# Altium PCB eggubator.PcbDoc (part 1 of 2)
Units mil, origin at the board's own origin, x right, y up, seen from the top; angles counter-clockwise.
Board outline 5983.25 x 3976.38 mil, 2 copper layers (Top Layer, Bottom Layer); 80 components, 96 nets, 327 pads, 68 vias.
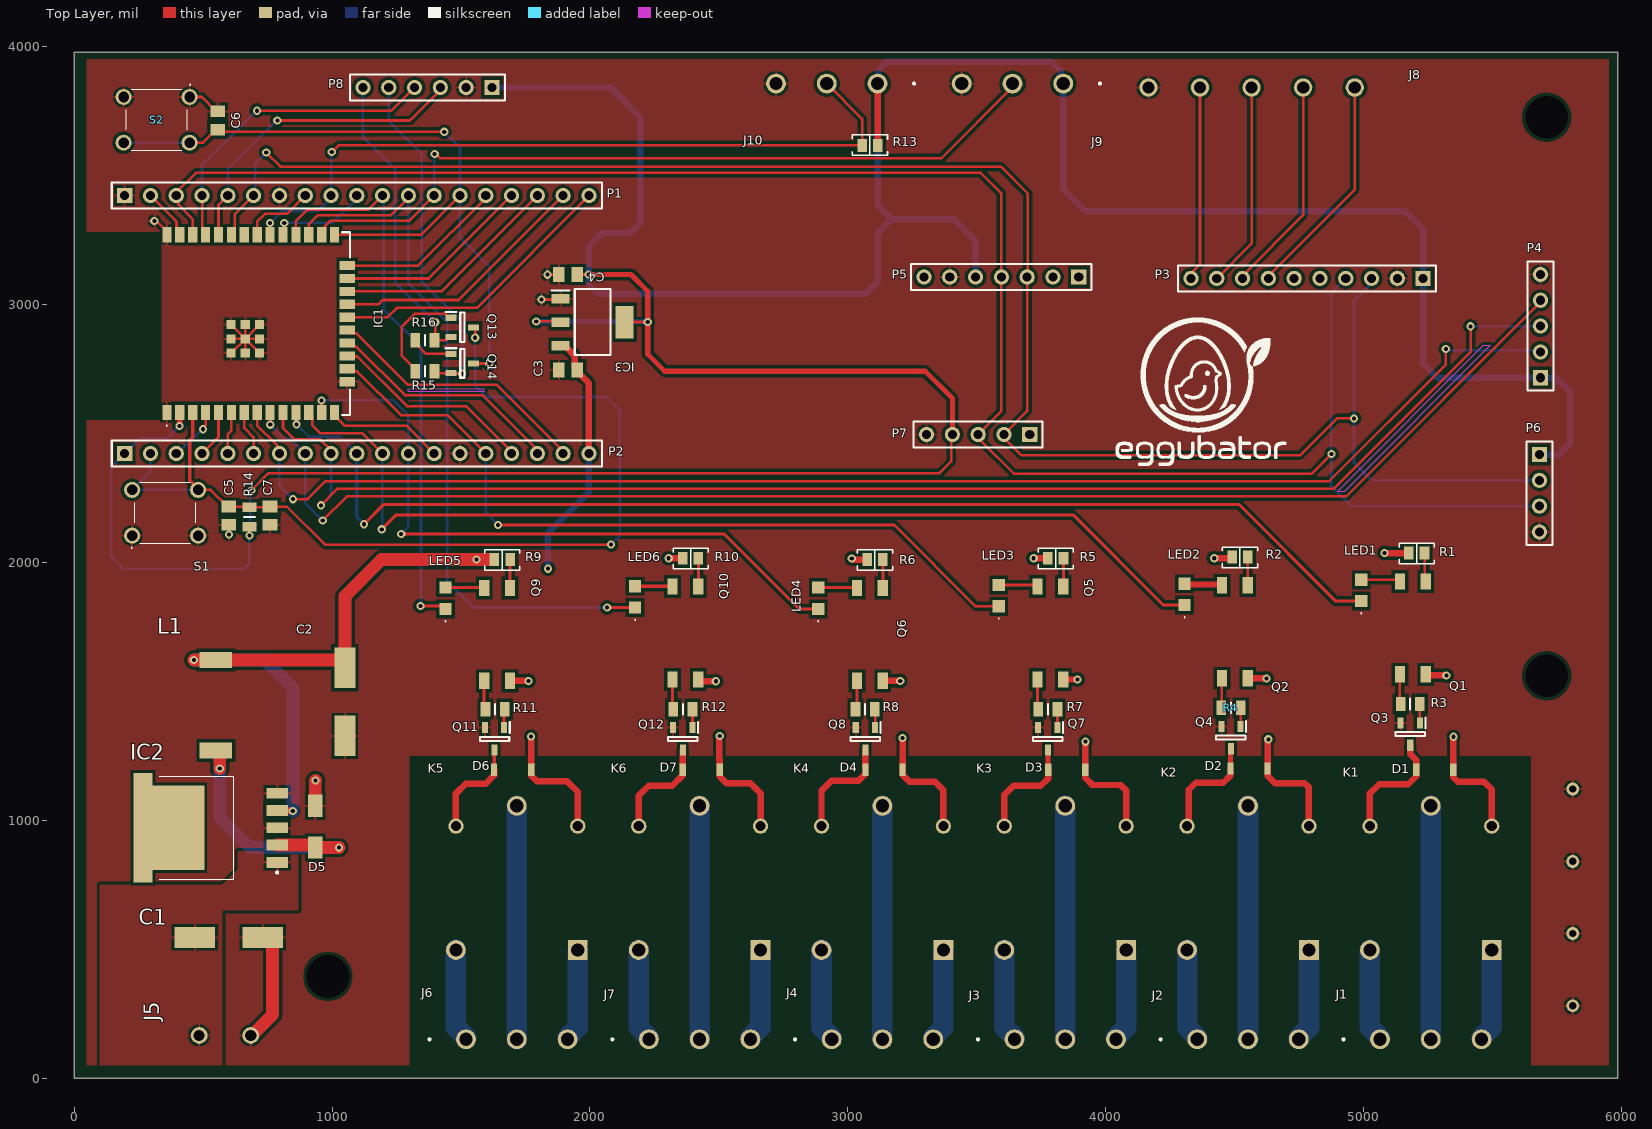
[diagram p0: Top Layer view]
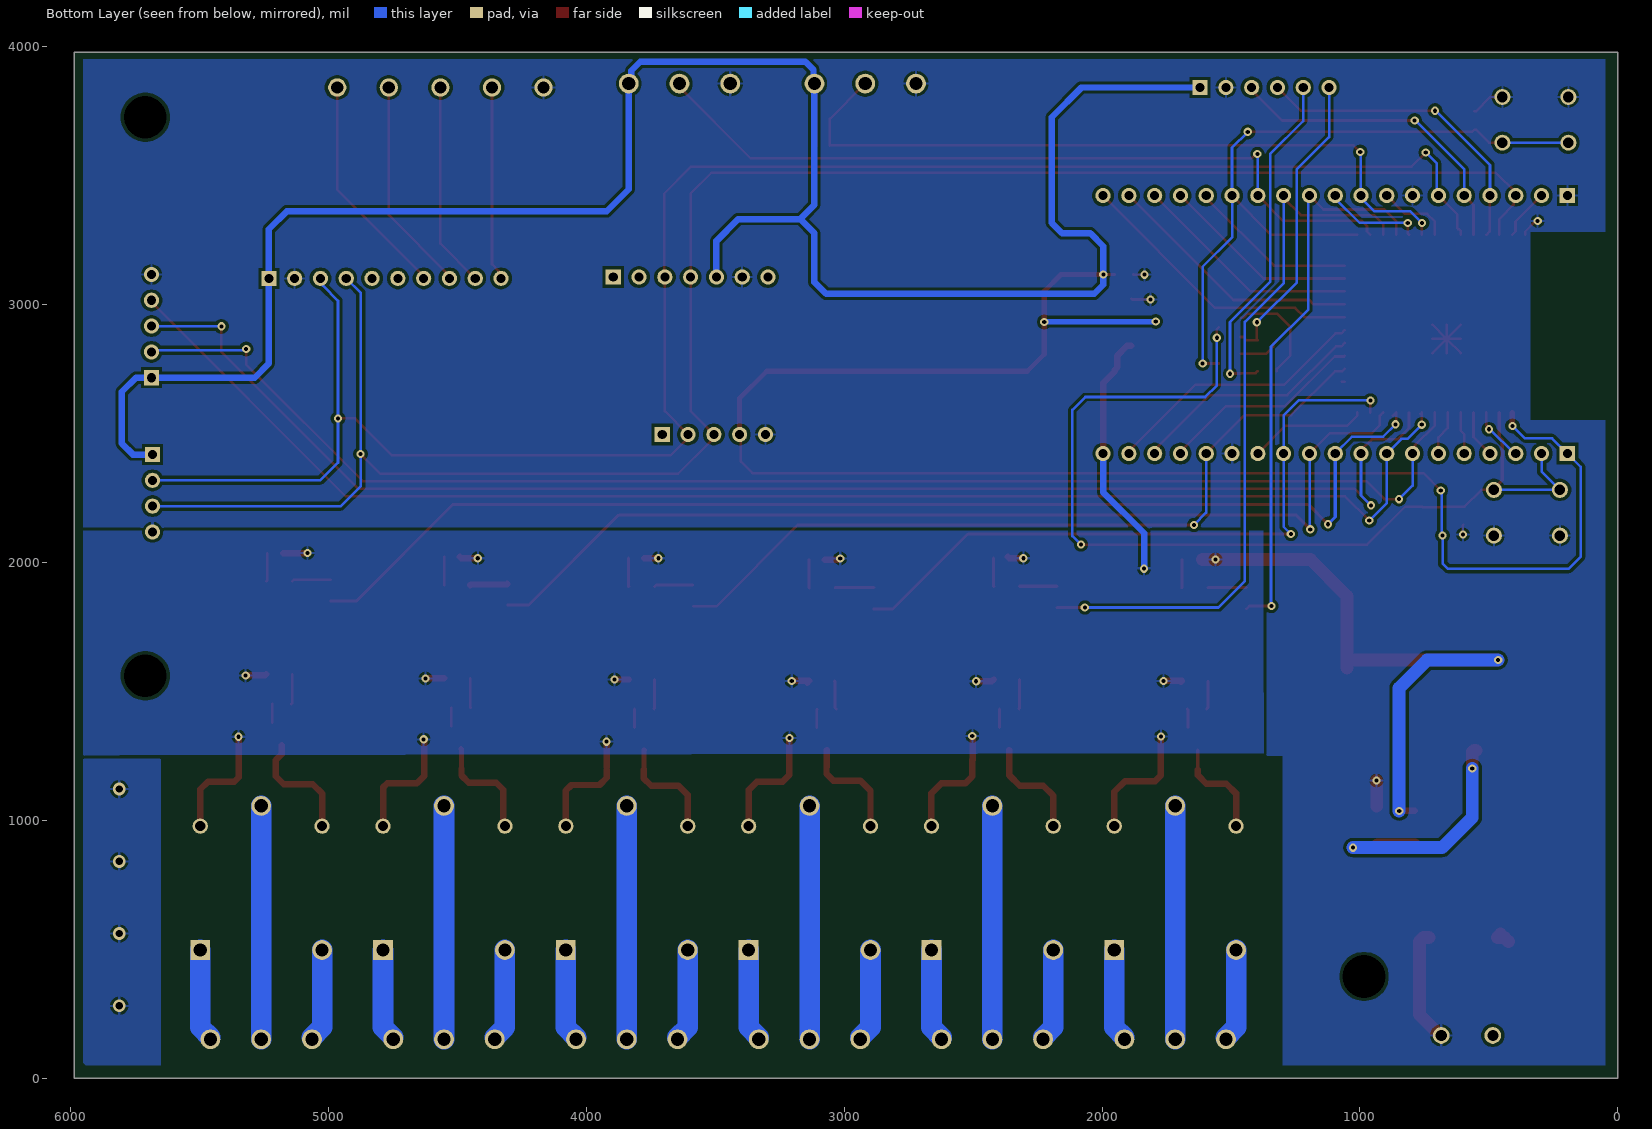
[diagram p1: Bottom Layer view, seen from below]
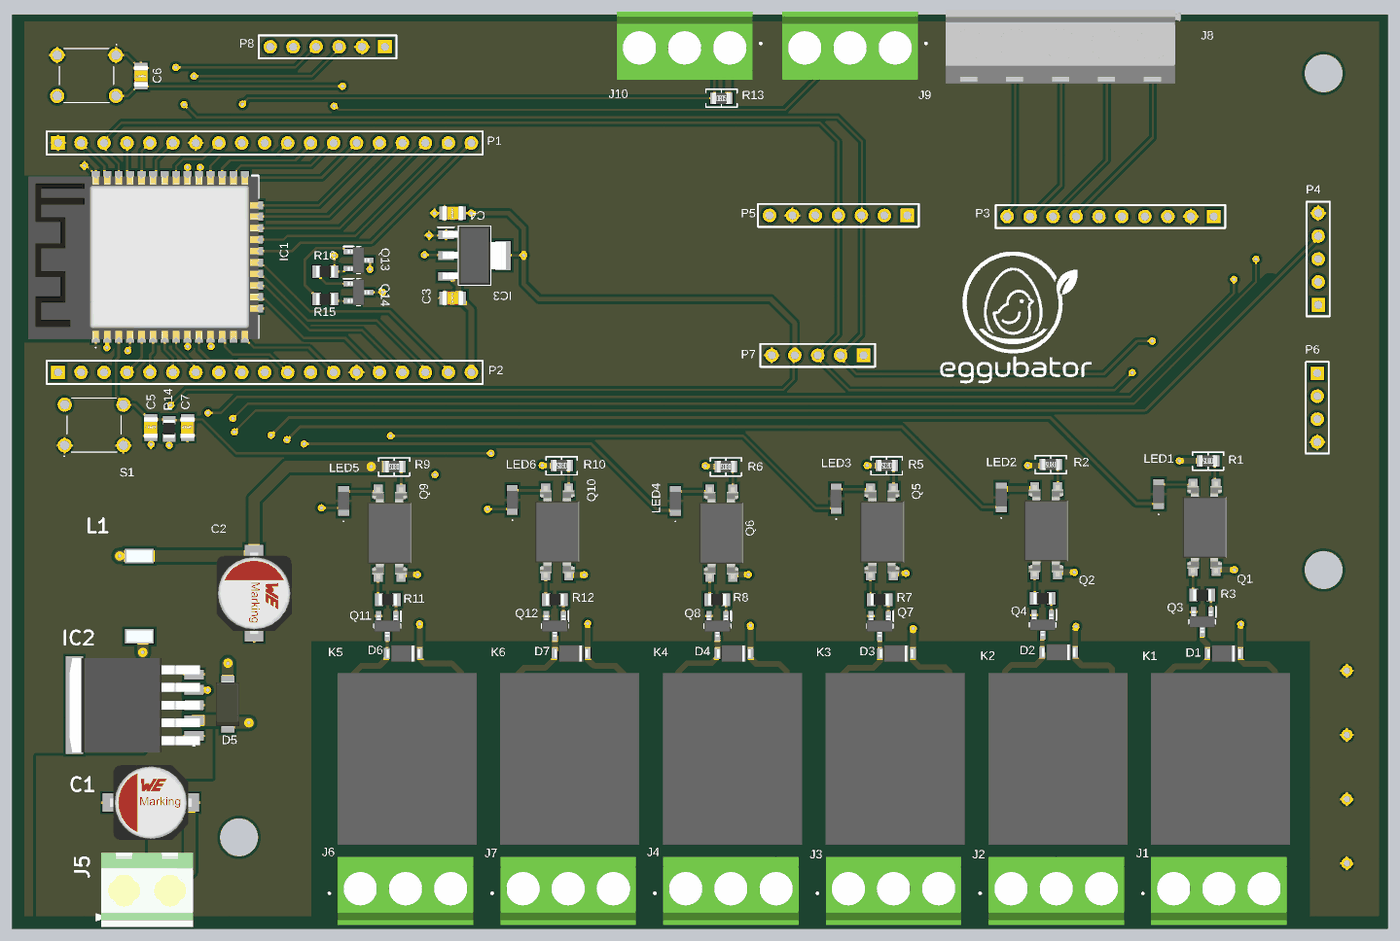
[diagram p2: 3D render of the assembled board from above, using the file's embedded part models]

## Layer stack, top to bottom
Top Solder: solder mask 0.4, Solder Resist, Dk 3.5
Top Layer: signal copper 1.4
Dielectric 1: dielectric 12.6, FR-4, Dk 4.8
Bottom Layer: signal copper 1.4
Bottom Solder: solder mask 0.4, Solder Resist, Dk 3.5

## Board outline
1,0 1,3976.38 5984.25,3976.38 5984.25,0

## Design rules (kind name [scope] priority, off if disabled: settings)
Clearance [All] p1: gap=12 ignorepadtopadclearanceinfootprint=TRUE
Creepage [All] p1: checkdistance=10 applytopolygonpour=TRUE
HoleSize [All] p1: absolutevalues=TRUE maxlimit=200 minlimit=1 maxpercent=80.000 minpercent=20.000
MinimumSolderMaskSliver [All] p1: minsoldermaskwidth=4
PolygonConnect [All] p1: connectstyle=Relief reliefconductorwidth=10 reliefentries=4 polygonreliefangle="90 Angle" airgapwidth=10
RoutingVias [All] p1: holewidth=16 width=32 viastyle="Through Hole" minholewidth=12 minwidth=24 maxholewidth=16 maxwidth=32
SilkToSolderMaskClearance [IsPad] p1: minsilkscreentomaskgap=4 clearancetoexposedcopper=TRUE
SolderMaskExpansion [All] p1: expansion=4 istentingtop=FALSE
Width Width_1 [All] p1: maxlimit=100 minlimit=10 preferedwidth=10
27 further rules are at their usual default settings.

## Classes and differential pairs
net class SENSOR_BUS: BTN_DOWN BTN_OK BTN_UP CLK CMD DHT_PIN DS18B20_PIN I2C_SCL I2C_SDA SD0 SD1 SD2 SD3
net class ESP32_GPIO: A0 A1 A2 A3 EN IO0 IO2 IO5 IO12 IO13 IO14 IO15 IO16 IO17 IO19 IO23 IO26 IO27 IO34 IO35 SD0 SD1 SD2 SD3 SENSOR_VN SENSOR_VP
net class RELAY_DRIVE: NetQ1_1 NetQ1_3 NetQ2_1 NetQ2_3 NetQ3_1 NetQ4_1 NetQ5_1 NetQ5_3 NetQ6_1 NetQ6_3 NetQ7_1 NetQ8_1 NetQ9_1 NetQ9_3 NetQ10_1 NetQ10_3 NetQ11_1 NetQ12_1 NetQ13_1 NetQ14_1 VBAT
net class RELAY_CONTACT: R1_C R1_COM R1_NC R1_NO R2_C R2_COM R2_NC R2_NO R3_C R3_COM R3_NC R3_NO R4_C R4_COM R4_NC R4_NO R5_C R5_COM R5_NC R5_NO R6_C R6_COM R6_NC R6_NO
net class PWR_3V3: VCC_3.3V
net class PWR_5V: VCC_5V VIN

## Components (designator, comment, footprint, x,y, rotation, side; value= is the part's Value field where it differs from the comment)
C1 "865060453007" CAPAE830X1050N 600,545 r0 top
C2 "865060453007" CAPAE830X1050N 1050,1458.11 r270 top
C3 "22µF" C0805 1915,2745 r0 top
C4 "22µF" C0805 1915,3115 r0 top
C5 "100nF" C0805 600,2180 r270 top
C6 "100nF" C0805 557,3712 r90 top
C7 "100nF" C0805 760,2180 r270 top
D1 "1N4007FLTR" SODFL3718X140N 5275,1195 r180 top
D2 "1N4007FLTR" SODFL3718X140N 4555,1200 r180 top
D3 "1N4007FLTR" SODFL3718X140N 3848,1195 r180 top
D4 "1N4007FLTR" SODFL3718X140N 3140,1195 r180 top
D5 "SS54" DIOM5026X262N 935,974.29 r90 top
D6 "1N4007FLTR" SODFL3718X140N 1700,1195 r180 top
D7 "1N4007FLTR" SODFL3718X140N 2431,1195 r180 top
IC1 "ESP32-WROOM-32E-N4" ESP32WROOM32EN4 567.09,2924.49 r90 top
IC2 "LM2596S-ADJ_NOPB" LM2596SXADJ 530,970 r0 top
IC3 "LM1117IMPX3.3_NOPB" SOT230P700X180-4N 2010,2930 r0 top
J1 "691137710003" 691137710003 5062.99,150 r0 top
J2 "691137710003" 691137710003 4354.33,150 r0 top
J3 "691137710003" 691137710003 3645.67,150 r0 top
J4 "691137710003" 691137710003 2937.01,150 r0 top
J5 "282837-2" 2828372 685,165 r180 top
J6 "691137710003" 691137710003 1519.68,150 r0 top
J7 "691137710003" 691137710003 2228.35,150 r0 top
J8 "282837-5" 2828375 4965,3840 r180 top
J9 "691137710003" 691137710003 3835,3855 r180 top
J10 "691137710003" 691137710003 3115,3855 r180 top
K1 "AWHSH112D00G" AWHSH112D00G 5496.06,496.06 r270 top
K2 "AWHSH112D00G" AWHSH112D00G 4787.4,496.06 r270 top
K3 "AWHSH112D00G" AWHSH112D00G 4078.74,496.06 r270 top
K4 "AWHSH112D00G" AWHSH112D00G 3370.08,496.06 r270 top
K5 "AWHSH112D00G" AWHSH112D00G 1952.76,496.06 r270 top
K6 "AWHSH112D00G" AWHSH112D00G 2661.42,496.06 r270 top
L1 "CDRH104RNP-331NC" CDRH104RNP331NC 550,1445 r180 top
LED1 "LED" XZMDK54W4 4990,1890 r90 top
LED2 "LED" XZMDK54W4 4305,1875 r90 top
LED3 "LED" XZMDK54W4 3585,1870 r90 top
LED4 "LED" XZMDK54W4 2885,1860 r90 top
LED5 "LED" XZMDK54W4 1440,1860 r90 top
LED6 "LED" XZMDK54W4 2175,1865 r90 top
P1 "Header 19" HDR1X19 196.1,3420.87 r0 top
P2 "Header 19" HDR1X19 196.1,2420.87 r0 top
P3 "Header 10" HDR1X10 5230,3100 r180 top
P4 "Header 5" HDR1X5 5685,2715 r90 top
P5 "Header 7" HDR1X7 3895,3105 r180 top
P6 "Header 4" HDR1X4 5681,2417 r270 top
P7 "Header 5" HDR1X5 3705,2495 r180 top
P8 "Header 6" HDR1X6 1620,3840 r180 top
Q1 "APC-817C1-SL" APC817C1SL 5190,1745.12 r270 top
Q2 "APC-817C1-SL" APC817C1SL 4500,1730 r270 top
Q3 "MMBT2222A-G" SOT95P240X115-3N 5180,1333.31 r270 top
Q4 "MMBT2222A-G" SOT95P240X115-3N 4485,1320 r270 top
Q5 "APC-817C1-SL" APC817C1SL 3785,1725 r270 top
Q6 "APC-817C1-SL" APC817C1SL 3085,1720 r270 top
Q7 "MMBT2222A-G" SOT95P240X115-3N 3775,1315 r270 top
Q8 "MMBT2222A-G" SOT95P240X115-3N 3068,1315 r270 top
Q9 "APC-817C1-SL" APC817C1SL 1640,1720 r270 top
Q10 "APC-817C1-SL" APC817C1SL 2370,1725.12 r270 top
Q11 "MMBT2222A-G" SOT95P240X115-3N 1630,1315 r270 top
Q12 "MMBT2222A-G" SOT95P240X115-3N 2360,1315 r270 top
Q13 "MMBT2222A-G" SOT95P240X115-3N 1505,2910 r0 top
Q14 "MMBT2222A-G" SOT95P240X115-3N 1505,2770 r0 top
R1 "680Ω" "RES 0805_2012 RF" 5205,2035 r180 top
R2 "680Ω" "RES 0805_2012 RF" 4520,2020 r180 top
R3 "1K" RESC2012X60N 5180,1450 r180 top
R4 "1K" RESC2012X60N 4485,1435 r180 top
R5 "680Ω" "RES 0805_2012 RF" 3805.51,2015 r180 top
R6 "680Ω" "RES 0805_2012 RF" 3105,2010 r180 top
R7 "1K" RESC2012X60N 3775,1430 r180 top
R8 "1K" RESC2012X60N 3067,1430 r180 top
R9 "680Ω" "RES 0805_2012 RF" 1660,2010 r180 top
R10 "680Ω" "RES 0805_2012 RF" 2390,2015 r180 top
R11 "1K" RESC2012X60N 1632.4,1430 r180 top
R12 "1K" RESC2012X60N 2360,1430 r180 top
R13 "4.7kΩ" "RES 0805_2012 RF" 3085.51,3615 r0 top
R14 "10kΩ" RESC2012X60N 680,2175 r270 top
R15 "10kΩ" RESC2012X60N 1360,2740 r0 top
R16 "10kΩ" RESC2012X60N 1360,2860 r0 top
S1 "TL1105AF160Q" TL1105AF160Q 225,2102.83 r90 top
S2 "TL1105AF160Q" TL1105AF160Q 448,3803.17 r270 top

## Footprints (in the part's own frame and the unit in brackets; to place one, negate y for a bottom-side part, rotate by r counter-clockwise, add the part's x,y. Pads: shape width x height; smd on the part's side, far side on the other; paste and mask are expansions set on the pad)
2828372 [mm]
  round 1.65 hole 1.1: 1(0,0) 2(5.08,0)
  body extent -2.51,-4.11 8.25,4.09, height 9.84
2828375 [mm]
  round 1.8 hole 1.2: 1(0,0) 2(5.08,0) 3(10.16,0) 4(15.24,0) 5(20.32,0)
  body extent -3.08,-4.1 22.92,4.1, height 9.93
691137710003 [mm]
  round 1.95 hole 1.3: 1(0,0) 2(5,0) 3(10,0)
  silkscreen extent -3.7,-0.1 -3.5,0.1, body extent -2.68,-3.5 12.32,4, height 11.5
APC817C1SL [mm]
  rect 1.6x1 smd: 1(-4.575,1.27) 2(-4.575,-1.27) 3(4.575,-1.27) 4(4.575,1.27)
  body extent -5.07,-2.44 5.07,2.44, height 3.6
AWHSH112D00G [mm]
  rect 1.95x1.95 hole 1.3: 1(0,0)
  round 1.5 hole 1: 2(-12.2,0) 4(-12.2,-12)
  round 1.95 hole 1.3: 3(-14.2,-6) 5(0,-12)
  body extent -15.6,-13.7 3.4,1.7, height 15.4
C0805 [mm]
  rect 1.15x1.45 smd: 1(-0.9,0) 2(0.9,0)
  body extent -1.15,-0.78 1.15,0.77, height 0.98
CAPAE830X1050N [mm]
  rect 4x2.05 smd: 1(-3.35,0) 2(3.35,0)
  body extent -4.5,-4.15 4.5,4.15, height 10.5
CDRH104RNP331NC [mm]
  rect 3.2x1.6 smd: 1(0,4.45) 2(0,-4.45)
  body extent -1.44,-5.09 1.44,5.09, height 0.1
DIOM5026X262N [mm]
  rect 2.2x1.45 smd: 1(-2.05,0) 2(2.05,0)
  body extent -2.52,-1.3 2.52,1.3, height 2.62
ESP32WROOM32EN4 [mm]
  rect 1.5x0.9 smd: 1(-8.75,5.26) 2(-8.75,3.99) 3(-8.75,2.72) 4(-8.75,1.45) 5(-8.75,0.18) 6(-8.75,-1.09) 7(-8.75,-2.36) 8(-8.75,-3.63) 9(-8.75,-4.9) 10(-8.75,-6.17) 11(-8.75,-7.44) 12(-8.75,-8.71) 13(-8.75,-9.98) 14(-8.75,-11.25) 25(8.75,-11.25) 26(8.75,-9.98) 27(8.75,-8.71) 28(8.75,-7.44) 29(8.75,-6.17) 30(8.75,-4.9) 31(8.75,-3.63) 32(8.75,-2.36) 33(8.75,-1.09) 34(8.75,0.18) 35(8.75,1.45) 36(8.75,2.72) 37(8.75,3.99) 38(8.75,5.26)
  rect 0.9x1.5 smd: 15(-5.715,-12.5) 16(-4.445,-12.5) 17(-3.175,-12.5) 18(-1.905,-12.5) 19(-0.635,-12.5) 20(0.635,-12.5) 21(1.905,-12.5) 22(3.175,-12.5) 23(4.445,-12.5) 24(5.715,-12.5)
  rect 0.9x0.9 smd: 39(-2.9,-1.06) 40(-2.9,-2.46) 41(-2.9,-3.86) 42(-1.5,-3.86) 43(-0.1,-3.86) 44(-0.1,-2.46) 45(-0.1,-1.06) 46(-1.5,-1.06) 47(-1.5,-2.46)
  silkscreen extent -10.1,-12.75 9,5.31, body extent -9.21,-12.84 8.98,12.75, height 3.2
HDR1X4 [mm] "Connector; Header; 4 Position"
  rect 1.5x1.5 hole 0.9: 1(0,0)
  round 1.5 hole 0.9: 2(2.54,0) 3(5.08,0) 4(7.62,0)
  silkscreen extent -1.27,-1.27 8.89,1.27
HDR1X5 [mm] "Connector; Header; 5 Position"
  rect 1.5x1.5 hole 0.9: 1(0,0)
  round 1.5 hole 0.9: 2(2.54,0) 3(5.08,0) 4(7.62,0) 5(10.16,0)
  silkscreen extent -1.27,-1.27 11.43,1.27
HDR1X6 [mm] "Connector; Header; 6 Position"
  rect 1.5x1.5 hole 0.9: 1(0,0)
  round 1.5 hole 0.9: 2(2.54,0) 3(5.08,0) 4(7.62,0) 5(10.16,0) 6(12.7,0)
  silkscreen extent -1.27,-1.27 13.97,1.27
HDR1X7 [mm] "Connector; Header; 7 Position"
  rect 1.5x1.5 hole 0.9: 1(0,0)
  round 1.5 hole 0.9: 2(2.54,0) 3(5.08,0) 4(7.62,0) 5(10.16,0) 6(12.7,0) 7(15.24,0)
  silkscreen extent -1.27,-1.27 16.51,1.27
HDR1X10 [mm] "Connector; Header; 10 Position"
  rect 1.5x1.5 hole 0.9: 1(0,0)
  round 1.5 hole 0.9: 2(2.54,0) 3(5.08,0) 4(7.62,0) 5(10.16,0) 6(12.7,0) 7(15.24,0) 8(17.78,0) 9(20.32,0) 10(22.86,0)
  silkscreen extent -1.27,-1.27 24.13,1.27
HDR1X19 [mm] "Connector; Header; 19 Position"
  rect 1.5x1.5 hole 0.9: 1(0,0)
  round 1.5 hole 0.9: 2(2.54,0) 3(5.08,0) 4(7.62,0) 5(10.16,0) 6(12.7,0) 7(15.24,0) 8(17.78,0) 9(20.32,0) 10(22.86,0) 11(25.4,0) 12(27.94,0) 13(30.48,0) 14(33.02,0) 15(35.56,0) 16(38.1,0) 17(40.64,0) 18(43.18,0) 19(45.72,0)
  silkscreen extent -1.27,-1.27 46.99,1.27
LM2596SXADJ [mm]
  rect 2.16x1.07 smd: 1(6.545,-3.4) 2(6.545,-1.7) 3(6.545,0) 4(6.545,1.7) 5(6.545,3.4)
  rect 1.91x10.8 smd: T1(-6.67,0)
  rect 5.08x8.33 smd: T2(-3.175,0)
  silkscreen extent -5.06,-5.08 6.64,5.08, body extent -7.2,-5.21 7.19,5.2, height 4.8
"RES 0805_2012 RF" [mm] "Chip Resistor, 2-Leads, Body 2.00x1.25mm, IPC High Density"
  rect 0.95x1.25 smd: 1(-0.775,0) 2(0.775,0)
  silkscreen extent -1.73,-0.97 1.73,1.04, body extent -1,-0.62 1,0.63, height 0.6
RESC2012X60N [mm]
  rect 0.95x1.4 smd: 1(-0.95,0) 2(0.95,0)
  silkscreen extent 0,-0.53 0,0.53, body extent -1,-0.63 1,0.63, height 0.6
SODFL3718X140N [mm]
  rect 0.63x1.22 smd: 1(-1.825,0) 2(1.825,0)
  body extent -1.85,-0.92 1.85,0.92, height 1.4
SOT95P240X115-3N [mm]
  rect 1.1x0.6 smd: 1(-1.1,0.95) 2(-1.1,-0.95) 3(1.1,0)
  silkscreen extent -1.65,-1.45 0.2,1.5, body extent -1.2,-1.45 1.2,1.45, height 1.15
SOT230P700X180-4N [mm]
  rect 1.75x0.95 smd: 1(-3.15,2.3) 2(-3.15,0) 3(-3.15,-2.3)
  rect 1.75x3.2 smd: 4(3.15,0)
  silkscreen extent -4.03,-3.25 1.75,3.25, body extent -3.5,-3.25 3.5,3.25, height 1.68
TL1105AF160Q [mm]
  round 1.575 hole 1.05: 1(0,0) 2(0,-6.5) 3(4.5,0) 4(4.5,-6.5)
  silkscreen extent -1.25,-6.25 5.25,0.1
XZMDK54W4 [mm]
  rect 1.2x1.2 smd: 1(-1.05,0) 2(1.05,0)
  silkscreen extent -2.3,-0.05 -2.2,0.05, body extent -1,-0.63 1,0.63, height 0.6

## Part data
C1 C2: "Capacitor Polarised", Manufacturer_Name="Wurth Elektronik", Mouser Part Number=710-865060453007, Datasheet Link=https://www.we-online.com/catalog/datasheet/865060453007.pdf, Height=10.5mm, Manufacturer_Part_Number=865060453007, Mouser Price/Stock=https://www.mouser.co.uk/ProductDetail/Wurth-Elektronik/865060453007?qs=0KOYDY2FL2%2F7v5bvtUSDMA%3D%3D
C3 C4: library part CC0805MKX5R7BB226, "16V 22uF X5R ±20% 0805 Multilayer Ceramic Capacitors MLCC - SMD/SMT ROHS", Case Code (Imperial)=0805, Case Code (Metric)=2012, Dielectric=X5R, Dielectric Material=Ceramic, Manufacturer="Yageo Group", Manufacturer Package Identifier="0805 (2012 metric)", Max Operating Temperature=85°C, Min Operating Temperature=-55°C, Tolerance=20%, Voltage Rating=16V, Capacitance=22µF, Case/Package=0805, Category="Ceramic Capacitors", China RoHS=Compliant, ComponentLink1Description=https://datasheet.octopart.com:443/CC0805MKX5R7BB226-Yageo-datasheet-170350636.pdf?src-supplier=IHS, ComponentLink1URL=https://datasheet.octopart.com:443/CC0805MKX5R7BB226-Yageo-datasheet-170350636.pdf?src-supplier=IHS, ComponentLink2Description=https://datasheet.octopart.com:443/CC0805MKX5R7BB226-Yageo-datasheet-181969992.pdf?src-supplier=Farnell, ComponentLink2URL=https://datasheet.octopart.com:443/CC0805MKX5R7BB226-Yageo-datasheet-181969992.pdf?src-supplier=Farnell, ComponentLink3Description=https://datasheet.octopart.com:443/CC0805MKX5R7BB226-Yageo-datasheet-145016144.pdf?src-supplier=ODG+(Origin+Data+Global), ComponentLink3URL=https://datasheet.octopart.com:443/CC0805MKX5R7BB226-Yageo-datasheet-145016144.pdf?src-supplier=ODG+(Origin+Data+Global), ComponentLink4Description=https://datasheet.octopart.com/CC0805MKX5R7BB226-Yageo-datasheet-86397281.pdf, ComponentLink4URL=https://datasheet.octopart.com/CC0805MKX5R7BB226-Yageo-datasheet-86397281.pdf, ComponentLink5Description=https://datasheet.octopart.com:443/CC0805MKX5R7BB226-Yageo-Group-datasheet-175963154.pdf?src-supplier=Newark, ComponentLink5URL=https://datasheet.octopart.com:443/CC0805MKX5R7BB226-Yageo-Group-datasheet-175963154.pdf?src-supplier=Newark, ComponentLink6Description=https://datasheet.octopart.com:443/CC0805MKX5R7BB226-Yageo-datasheet-59875459.pdf?src-supplier=Future+Electronics, ComponentLink6URL=https://datasheet.octopart.com:443/CC0805MKX5R7BB226-Yageo-datasheet-59875459.pdf?src-supplier=Future+Electronics, ComponentLink7Description=https://datasheet.octopart.com:443/CC0805MKX5R7BB226-Yageo-datasheet-62058312.pdf?src-supplier=Future+Electronics, ComponentLink7URL=https://datasheet.octopart.com:443/CC0805MKX5R7BB226-Yageo-datasheet-62058312.pdf?src-supplier=Future+Electronics, ComponentLink8Description=https://datasheet.octopart.com:443/CC0805MKX5R7BB226-Yageo-datasheet-62067349.pdf?src-supplier=Future+Electronics, ComponentLink8URL=https://datasheet.octopart.com:443/CC0805MKX5R7BB226-Yageo-datasheet-62067349.pdf?src-supplier=Future+Electronics, ComponentLink9Description=https://datasheet.octopart.com:443/CC0805MKX5R7BB226-Yageo-Group-datasheet-192360830.pdf?src-supplier=Future+Electronics, ComponentLink9URL=https://datasheet.octopart.com:443/CC0805MKX5R7BB226-Yageo-Group-datasheet-192360830.pdf?src-supplier=Future+Electronics, ComponentLink10Description=http://sigma.octopart.com:80/conflict_mineral_statement/Yageo-company-3.pdf?src-supplier=Compliance+Statements, ComponentLink10URL=http://sigma.octopart.com:80/conflict_mineral_statement/Yageo-company-3.pdf?src-supplier=Compliance+Statements, ComponentLink11Description=http://sigma.octopart.com:80/rohs_statement/Yageo-company-2.pdf?src-supplier=Compliance+Statements, ComponentLink11URL=http://sigma.octopart.com:80/rohs_statement/Yageo-company-2.pdf?src-supplier=Compliance+Statements, Composition=Ceramic, Country of Origin="Mainland China, Taiwan", Export Control Classification Number (ECCN) Code=EAR99, Halogen Free="Halogen Free", Harmonized Tariff Schedule (HTS) Code=8532.24.00.20, Height=1.25mm, Introduction Date=2014-07-08, Lead Free="Lead Free", Length=2mm, Lifecycle Status=Production, Manufacturer Part Number=CC0805MKX5R7BB226, Mount="Surface Mount", Number of Terminals=2, Packaging="Tape & Reel (TR)", Pricing 1="14=0.1905 (USD)", REACH SVHC=Yes, RoHS=Compliant, Stock 1=20, Supplier 1="Arrow Electronics", Supplier Part Number 1=CC0805MKX5R7BB226, Termination=SMD/SMT, Thickness=1.4478mm, Voltage Rating (DC)=16V, Weight=5.499807mg, Width=1.25mm
C5 C6 C7: library part C0805C104K5RACTU, "50V 100nF X7R ±10% 0805 Multilayer Ceramic Capacitors MLCC - SMD/SMT ROHS", Case Code (Imperial)=0805, Dielectric=X7R, Dielectric Material=Ceramic, Manufacturer="Yageo Group", Max Operating Temperature=125°C, Min Operating Temperature=-55°C, Supplier Part Number 1=C0805C104K5RAC7800, Temperature Coefficient=30ppm/°C, Tolerance=10%, Voltage=500V, Voltage Rating=50V, Capacitance=100nF, Case/Package=0805, Category="Ceramic Capacitors", China RoHS=Compliant, ComponentLink1Description=https://datasheet.octopart.com:443/C0805C104K5RACTU-KEMET-datasheet-178445679.pdf?src-supplier=IHS, ComponentLink1URL=https://datasheet.octopart.com:443/C0805C104K5RACTU-KEMET-datasheet-178445679.pdf?src-supplier=IHS, ComponentLink2Description=https://datasheet.octopart.com:443/C0805C104K5RAC7800-KEMET-datasheet-182041128.pdf?src-supplier=IHS, ComponentLink2URL=https://datasheet.octopart.com:443/C0805C104K5RAC7800-KEMET-datasheet-182041128.pdf?src-supplier=IHS, ComponentLink3Description=https://datasheet.octopart.com:443/C0805C104K5RACTU-KEMET-datasheet-137357759.pdf?src-supplier=Upverter, ComponentLink3URL=https://datasheet.octopart.com:443/C0805C104K5RACTU-KEMET-datasheet-137357759.pdf?src-supplier=Upverter, ComponentLink4Description=https://datasheet.octopart.com:443/C0805C104K5RACTU-KEMET-datasheet-68331921.pdf?src-supplier=Upverter, ComponentLink4URL=https://datasheet.octopart.com:443/C0805C104K5RACTU-KEMET-datasheet-68331921.pdf?src-supplier=Upverter, ComponentLink5Description=https://datasheet.octopart.com:443/C0805C104K5RAC-TU-Kemet-datasheet-5313890.pdf?src-supplier=Newark, ComponentLink5URL=https://datasheet.octopart.com:443/C0805C104K5RAC-TU-Kemet-datasheet-5313890.pdf?src-supplier=Newark, ComponentLink6Description=https://datasheet.octopart.com:443/C0805C104K5RAC-TU-Kemet-datasheet-5390537.pdf?src-supplier=Newark, ComponentLink6URL=https://datasheet.octopart.com:443/C0805C104K5RAC-TU-Kemet-datasheet-5390537.pdf?src-supplier=Newark, ComponentLink7Description=https://datasheet.octopart.com:443/C0805C104K5RAC-TU-Kemet-datasheet-7541751.pdf?src-supplier=Newark, ComponentLink7URL=https://datasheet.octopart.com:443/C0805C104K5RAC-TU-Kemet-datasheet-7541751.pdf?src-supplier=Newark, ComponentLink8Description=https://datasheet.octopart.com:443/C0805C104K5RACTU-KEMET-datasheet-170667449.pdf?src-supplier=Newark, ComponentLink8URL=https://datasheet.octopart.com:443/C0805C104K5RACTU-KEMET-datasheet-170667449.pdf?src-supplier=Newark, ComponentLink9Description=https://datasheet.octopart.com:443/C0805C104K5RACTU-Kemet-datasheet-14356739.pdf?src-supplier=Newark, ComponentLink9URL=https://datasheet.octopart.com:443/C0805C104K5RACTU-Kemet-datasheet-14356739.pdf?src-supplier=Newark, ComponentLink10Description=https://datasheet.octopart.com:443/C0805C104K5RACTU-Kemet-datasheet-8764837.pdf?src-supplier=Newark, ComponentLink10URL=https://datasheet.octopart.com:443/C0805C104K5RACTU-Kemet-datasheet-8764837.pdf?src-supplier=Newark, ComponentLink11Description=https://datasheet.octopart.com:443/C0805C104K5RACTU-Kemet-datasheet-8480123.pdf?src-supplier=Newark, ComponentLink11URL=https://datasheet.octopart.com:443/C0805C104K5RACTU-Kemet-datasheet-8480123.pdf?src-supplier=Newark, ComponentLink12Description=https://datasheet.octopart.com:443/C0805C104K5RACTU-Kemet-datasheet-5393970.pdf?src-supplier=Newark, ComponentLink12URL=https://datasheet.octopart.com:443/C0805C104K5RACTU-Kemet-datasheet-5393970.pdf?src-supplier=Newark, ComponentLink13Description=https://datasheet.octopart.com:443/C0805C104K5RACTU-Kemet-datasheet-8502025.pdf?src-supplier=Newark, ComponentLink13URL=https://datasheet.octopart.com:443/C0805C104K5RACTU-Kemet-datasheet-8502025.pdf?src-supplier=Newark, ComponentLink14Description=https://datasheet.octopart.com:443/C0805C104K5RACTU-Kemet-datasheet-161801.pdf?src-supplier=Newark, ComponentLink14URL=https://datasheet.octopart.com:443/C0805C104K5RACTU-Kemet-datasheet-161801.pdf?src-supplier=Newark, ComponentLink15Description=https://datasheet.octopart.com:443/C0805C104K5RACTU-KEMET-datasheet-101576148.pdf?src-supplier=Farnell, ComponentLink15URL=https://datasheet.octopart.com:443/C0805C104K5RACTU-KEMET-datasheet-101576148.pdf?src-supplier=Farnell, ComponentLink16Description=https://datasheet.octopart.com:443/C0805C104K5RACTU-KEMET-datasheet-176142297.pdf?src-supplier=Farnell, ComponentLink16URL=https://datasheet.octopart.com:443/C0805C104K5RACTU-KEMET-datasheet-176142297.pdf?src-supplier=Farnell, ComponentLink17Description=https://datasheet.octopart.com:443/C0805C104K5RAC-TU-Kemet-datasheet-12608295.pdf?src-supplier=Farnell, ComponentLink17URL=https://datasheet.octopart.com:443/C0805C104K5RAC-TU-Kemet-datasheet-12608295.pdf?src-supplier=Farnell, ComponentLink18Description=https://datasheet.octopart.com:443/C0805C104K5RAC-TU-Kemet-datasheet-11992184.pdf?src-supplier=Farnell, ComponentLink18URL=https://datasheet.octopart.com:443/C0805C104K5RAC-TU-Kemet-datasheet-11992184.pdf?src-supplier=Farnell, ComponentLink19Description=https://datasheet.octopart.com:443/C0805C104K5RAC-TU-Kemet-datasheet-10942409.pdf?src-supplier=Farnell, ComponentLink19URL=https://datasheet.octopart.com:443/C0805C104K5RAC-TU-Kemet-datasheet-10942409.pdf?src-supplier=Farnell, ComponentLink20Description=https://datasheet.octopart.com:443/C0805C104K5RAC-TU-Kemet-datasheet-10404442.pdf?src-supplier=Farnell, ComponentLink20URL=https://datasheet.octopart.com:443/C0805C104K5RAC-TU-Kemet-datasheet-10404442.pdf?src-supplier=Farnell, ComponentLink21Description=https://datasheet.octopart.com:443/C0805C104K5RAC-TU-Kemet-datasheet-7833651.pdf?src-supplier=Farnell, ComponentLink21URL=https://datasheet.octopart.com:443/C0805C104K5RAC-TU-Kemet-datasheet-7833651.pdf?src-supplier=Farnell, ComponentLink22Description=https://datasheet.octopart.com:443/C0805C104K5RAC-TU-Kemet-datasheet-7601896.pdf?src-supplier=Farnell, ComponentLink22URL=https://datasheet.octopart.com:443/C0805C104K5RAC-TU-Kemet-datasheet-7601896.pdf?src-supplier=Farnell, ComponentLink23Description=https://datasheet.octopart.com:443/C0805C104K5RAC-TU-Kemet-datasheet-5316294.pdf?src-supplier=Farnell, ComponentLink23URL=https://datasheet.octopart.com:443/C0805C104K5RAC-TU-Kemet-datasheet-5316294.pdf?src-supplier=Farnell, ComponentLink24Description=https://datasheet.octopart.com:443/C0805C104K5RAC-TU-Kemet-datasheet-5314837.pdf?src-supplier=Farnell, ComponentLink24URL=https://datasheet.octopart.com:443/C0805C104K5RAC-TU-Kemet-datasheet-5314837.pdf?src-supplier=Farnell, ComponentLink25Description=https://datasheet.octopart.com:443/C0805C104K5RAC-TU-Kemet-datasheet-8092359.pdf?src-supplier=Farnell, ComponentLink25URL=https://datasheet.octopart.com:443/C0805C104K5RAC-TU-Kemet-datasheet-8092359.pdf?src-supplier=Farnell, ComponentLink26Description=https://datasheet.octopart.com:443/C0805C104K5RACTU-Kemet-datasheet-5314449.pdf?src-supplier=Farnell, ComponentLink26URL=https://datasheet.octopart.com:443/C0805C104K5RACTU-Kemet-datasheet-5314449.pdf?src-supplier=Farnell, ComponentLink27Description=https://datasheet.octopart.com:443/C0805C104K5RAC-TU-Kemet-datasheet-5314969.pdf?src-supplier=Farnell, ComponentLink27URL=https://datasheet.octopart.com:443/C0805C104K5RAC-TU-Kemet-datasheet-5314969.pdf?src-supplier=Farnell, ComponentLink28Description=https://datasheet.octopart.com:443/C0805C104K5RAC-TU-Kemet-datasheet-5314627.pdf?src-supplier=Farnell, ComponentLink28URL=https://datasheet.octopart.com:443/C0805C104K5RAC-TU-Kemet-datasheet-5314627.pdf?src-supplier=Farnell, ComponentLink29Description=https://datasheet.octopart.com:443/C0805C104K5RAC-TU-Kemet-datasheet-5389132.pdf?src-supplier=Farnell, ComponentLink29URL=https://datasheet.octopart.com:443/C0805C104K5RAC-TU-Kemet-datasheet-5389132.pdf?src-supplier=Farnell, ComponentLink30Description=https://datasheet.octopart.com:443/C0805C104K5RAC-TU-Kemet-datasheet-5313836.pdf?src-supplier=Farnell, ComponentLink30URL=https://datasheet.octopart.com:443/C0805C104K5RAC-TU-Kemet-datasheet-5313836.pdf?src-supplier=Farnell, ComponentLink31Description=https://datasheet.octopart.com:443/C0805C104K5RAC-TU-Kemet-datasheet-8111010.pdf?src-supplier=Farnell, ComponentLink31URL=https://datasheet.octopart.com:443/C0805C104K5RAC-TU-Kemet-datasheet-8111010.pdf?src-supplier=Farnell, ComponentLink32Description=https://datasheet.octopart.com:443/C0805C104K5RAC-TU-Kemet-datasheet-7627733.pdf?src-supplier=Farnell, ComponentLink32URL=https://datasheet.octopart.com:443/C0805C104K5RAC-TU-Kemet-datasheet-7627733.pdf?src-supplier=Farnell, ComponentLink33Description=https://datasheet.octopart.com:443/C0805C104K5RAC-TU-Kemet-datasheet-5315946.pdf?src-supplier=Farnell, ComponentLink33URL=https://datasheet.octopart.com:443/C0805C104K5RAC-TU-Kemet-datasheet-5315946.pdf?src-supplier=Farnell, ComponentLink34Description=https://datasheet.octopart.com:443/C0805C104K5RACTU-KEMET-datasheet-37550250.pdf?src-supplier=Electro+Sonic, ComponentLink34URL=https://datasheet.octopart.com:443/C0805C104K5RACTU-KEMET-datasheet-37550250.pdf?src-supplier=Electro+Sonic, ComponentLink35Description=https://datasheet.octopart.com:443/C0805C104K5RAC-TU-Kemet-datasheet-32036385.pdf?src-supplier=element14+APAC, ComponentLink35URL=https://datasheet.octopart.com:443/C0805C104K5RAC-TU-Kemet-datasheet-32036385.pdf?src-supplier=element14+APAC, ComponentLink36Description=https://datasheet.octopart.com:443/C0805C104K5RACTU-Kemet-datasheet-22975000.pdf?src-supplier=element14+APAC, ComponentLink36URL=https://datasheet.octopart.com:443/C0805C104K5RACTU-Kemet-datasheet-22975000.pdf?src-supplier=element14+APAC, ComponentLink37Description=https://datasheet.octopart.com:443/C0805C104K5RACTU-Kemet-datasheet-22084244.pdf?src-supplier=element14+APAC, ComponentLink37URL=https://datasheet.octopart.com:443/C0805C104K5RACTU-Kemet-datasheet-22084244.pdf?src-supplier=element14+APAC, ComponentLink38Description=https://datasheet.octopart.com:443/C0805C104K5RAC7800-KEMET-datasheet-188512054.pdf?src-supplier=ODG+(Origin+Data+Global), ComponentLink38URL=https://datasheet.octopart.com:443/C0805C104K5RAC7800-KEMET-datasheet-188512054.pdf?src-supplier=ODG+(Origin+Data+Global), ComponentLink39Description=https://datasheet.octopart.com:443/C0805C104K5RACTU-KEMET-datasheet-164512540.pdf?src-supplier=TME, ComponentLink39URL=https://datasheet.octopart.com:443/C0805C104K5RACTU-KEMET-datasheet-164512540.pdf?src-supplier=TME, ComponentLink40Description=https://datasheet.octopart.com:443/C0805C104K5RACTU-Kemet-datasheet-67847106.pdf?src-supplier=TME, ComponentLink40URL=https://datasheet.octopart.com:443/C0805C104K5RACTU-Kemet-datasheet-67847106.pdf?src-supplier=TME, ComponentLink41Description=https://datasheet.octopart.com:443/C0805C104K5RACTU-KEMET-datasheet-68331906.pdf?src-supplier=TME, ComponentLink41URL=https://datasheet.octopart.com:443/C0805C104K5RACTU-KEMET-datasheet-68331906.pdf?src-supplier=TME, ComponentLink42Description=https://datasheet.octopart.com:443/C0805C104K5RACTU-KEMET-datasheet-110724412.pdf?src-supplier=RS+(Formerly+Allied+Electronics), ComponentLink42URL=https://datasheet.octopart.com:443/C0805C104K5RACTU-KEMET-datasheet-110724412.pdf?src-supplier=RS+(Formerly+Allied+Electronics), ComponentLink43Description=https://datasheet.octopart.com:443/C0805C104K5RACTU-Kemet-datasheet-464.pdf?src-supplier=RS+(Formerly+Allied+Electronics), ComponentLink43URL=https://datasheet.octopart.com:443/C0805C104K5RACTU-Kemet-datasheet-464.pdf?src-supplier=RS+(Formerly+Allied+Electronics), ComponentLink44Description=https://datasheet.octopart.com/C0805C104K5RACTU-KEMET-datasheet-84169754.pdf, ComponentLink44URL=https://datasheet.octopart.com/C0805C104K5RACTU-KEMET-datasheet-84169754.pdf, ComponentLink45Description=https://datasheet.octopart.com:443/C0805C104K5RACTU-Kemet-datasheet-13693438.pdf?src-supplier=Factory+Futures, ComponentLink45URL=https://datasheet.octopart.com:443/C0805C104K5RACTU-Kemet-datasheet-13693438.pdf?src-supplier=Factory+Futures, ComponentLink46Description=https://datasheet.octopart.com:443/C0805C104K5RAC7800-KEMET-datasheet-164857143.pdf?src-supplier=Burklin+Elektronik, ComponentLink46URL=https://datasheet.octopart.com:443/C0805C104K5RAC7800-KEMET-datasheet-164857143.pdf?src-supplier=Burklin+Elektronik, ComponentLink47Description=http://sigma.octopart.com:80/conflict_mineral_statement/Yageo-company-3.pdf?src-supplier=Compliance+Statements, ComponentLink47URL=http://sigma.octopart.com:80/conflict_mineral_statement/Yageo-company-3.pdf?src-supplier=Compliance+Statements, ComponentLink48Description=http://sigma.octopart.com:80/rohs_statement/Yageo-company-2.pdf?src-supplier=Compliance+Statements, ComponentLink48URL=http://sigma.octopart.com:80/rohs_statement/Yageo-company-2.pdf?src-supplier=Compliance+Statements, Contact Plating=Tin, Country of Origin="Mainland China", Depth=1.25mm, Export Control Classification Number (ECCN) Code=EAR99, Harmonized Tariff Schedule (HTS) Code=8532.24.00.20, Height=780µm, Introduction Date=2001-04-27, Lead Free="Lead Free", Lead Pitch=750µm, Length=2mm, Lifecycle Status=Production, Manufacturer Part Number=C0805C104K5RACTU, Material=Ceramic, Mount="Surface Mount", Number of Pins=2, Number of Terminals=2, Packaging="Cut Tape", Pricing 1="4000=0.0178 (USD)", Radiation Hardening=No, REACH SVHC=Yes, RoHS=Compliant, Schedule B="8532240020, 8532240020|8532240020, 8532240020|8532240020|8532240020, 8532240020|8532240020|8532240020|8532240020", Stock 1=5364000, Supplier 1="Arrow Electronics", Termination=SMD/SMT, Thickness=889µm, Voltage Rating (DC)=50V, Width=1.25mm
D1 D2 D3 D4 D6 D7: "Diode", Manufacturer_Name="SMC Diode Solutions", Datasheet Link=http://www.smc-diodes.com/propdf/1N4001FL-1N4007FL%20N1646%20REV.A.pdf, Height=1.4mm, Manufacturer_Part_Number=1N4007FLTR
D5: "Schottky Diode", Manufacturer_Name="DIYI Elec Tech", Datasheet Link=https://datasheet.lcsc.com/szlcsc/DIYI-Elec-Tech-SS54_C84165.pdf, Height=2.62mm, Manufacturer_Part_Number=SS54
IC1: "Integrated Circuit", Manufacturer_Name="Espressif Systems", Mouser Part Number=356-ESP32WRM32E132PH, Datasheet Link=https://www.espressif.com/sites/default/files/documentation/esp32-wroom-32e_esp32-wroom-32ue_datasheet_en.pdf, Height=3.25mm, Manufacturer_Part_Number=ESP32-WROOM-32E-N4, Mouser Price/Stock=https://www.mouser.co.uk/ProductDetail/Espressif-Systems/ESP32-WROOM-32E-N4?qs=Li%252BoUPsLEnsPzTWsi%252BRMgQ%3D%3D
IC2: "Integrated Circuit", Arrow Part Number=LM2596S-ADJ/NOPB, Manufacturer_Name="Texas Instruments", Mouser Part Number=926-LM2596S-ADJ/NOPB, Arrow Price/Stock=https://www.arrow.com/en/products/lm2596s-adjnopb_1/texas-instruments.html?utm_currency=USD&region=nac, Datasheet Link=https://www.ti.com/lit/ds/symlink/lm2596.pdf?HQS=ti-null-null-sf-df-pf-sep-wwe&ts=1592978195629, Height=4.57mm, Manufacturer_Part_Number=LM2596S-ADJ/NOPB, Mouser Price/Stock=https://www.mouser.co.uk/ProductDetail/Texas-Instruments/LM2596S-ADJ-NOPB?qs=X1J7HmVL2ZHoMN0DLDcNog%3D%3D
IC3: "Integrated Circuit", Manufacturer_Name="Texas Instruments", Manufacturer_Part_Number=LM1117IMPX3.3/NOPB, Datasheet Link=http://www.ti.com/lit/ds/symlink/lm1117.pdf, Height=1.8mm
J1 J2 J3 J4 J6 J7 J9 J10: "Connector", Manufacturer_Name="Wurth Elektronik", Mouser Part Number=710-691137710003, Datasheet Link=https://www.we-online.com/catalog/datasheet/691137710003.pdf, Height=11.5mm, Manufacturer_Part_Number=691137710003, Mouser Price/Stock=https://www.mouser.co.uk/ProductDetail/Wurth-Elektronik/691137710003?qs=lBTPRtX1sU9o6BU5kiMA0Q%3D%3D
J5: "Connector", Manufacturer_Name="TE Connectivity", Mouser Part Number=571-2828372, Arrow Part Number=282837-2, Arrow Price/Stock=https://www.arrow.com/en/products/282837-2_1/te-connectivity.html?utm_currency=USD&region=europe, Datasheet Link=https://www.te.com/commerce/DocumentDelivery/DDEController?Action=srchrtrv&DocNm=1-1773458-1_EURO_STYLE_QRG&DocType=Data%20Sheet&DocLang=English&PartCntxt=282837-2&DocFormat=pdf, Height=10.3mm, Manufacturer_Part_Number=282837-2, Mouser Price/Stock=https://www.mouser.co.uk/ProductDetail/TE-Connectivity/282837-2?qs=A%252Bip%252BNCYi6O2H0NGWOeAxg%3D%3D
J8: "Connector", Manufacturer_Name="TE Connectivity", Mouser Part Number=571-2828375, Arrow Part Number=282837-5, Arrow Price/Stock=https://www.arrow.com/en/products/282837-5_1/te-connectivity.html?utm_currency=USD, Datasheet Link=https://www.te.com/commerce/DocumentDelivery/DDEController?Action=srchrtrv&DocNm=1-1773458-1_EURO_STYLE_QRG&DocType=Data%20Sheet&DocLang=English&PartCntxt=282837-5&DocFormat=pdf, Height=10.3mm, Manufacturer_Part_Number=282837-5, Mouser Price/Stock=https://www.mouser.co.uk/ProductDetail/TE-Connectivity/282837-5?qs=A%252Bip%252BNCYi6MoalTIA9eyLA%3D%3D
K1 K2 K3 K4 K5 K6: "Relay or Contactor", Manufacturer_Name=Amphenol, Mouser Part Number=523-AWHSH112D00G, Datasheet Link=http://www.anytek.com.tw/Upload/CR(3)_AWHSH112D00G-f8b66dccaa4a4882b3087d859dc2bda8.pdf, Height=15.3mm, Manufacturer_Part_Number=AWHSH112D00G, Mouser Price/Stock=https://www.mouser.co.uk/ProductDetail/Amphenol-Anytek/AWHSH112D00G?qs=rSMjJ%252B1ewcSWmP7smrZ3dA%3D%3D
L1: "Inductor", Manufacturer_Name=Sumida, Mouser Part Number=851-CDRH104RNP-331NC, Arrow Part Number=CDRH104RNP-331NC, Arrow Price/Stock=https://www.arrow.com/en/products/cdrh104rnp-331nc/sumida.html?utm_currency=USD&region=nac, Datasheet Link=https://products.sumida.com/products/pdf/CDRH104R.pdf, Height=4mm, Manufacturer_Part_Number=CDRH104RNP-331NC, Mouser Price/Stock=https://www.mouser.co.uk/ProductDetail/Sumida/CDRH104RNP-331NC?qs=uLIFG%252B79HqEjY8J4po5V3w%3D%3D
LED1 LED2 LED3 LED4 LED5 LED6: library part XZMDK54W-4, "Single Color LED, Red, Water Clear, 1.3mm", Color=Red, Forward Current=30mA, Manufacturer=SunLED, Max Operating Temperature=85°C, Min Operating Temperature=-40°C, Supplier Part Number 1=1497-XZMDK54W-4CT-ND, Category=LEDs, China RoHS=Compliant, ComponentLink1Description=https://datasheet.octopart.com:443/XZMDK54W-4-SunLED-datasheet-181251984.pdf?src-supplier=IHS, ComponentLink1URL=https://datasheet.octopart.com:443/XZMDK54W-4-SunLED-datasheet-181251984.pdf?src-supplier=IHS, ComponentLink2Description=https://datasheet.octopart.com:443/XZMDK54W-4-SunLED-datasheet-142371012.pdf?src-supplier=SunLED+SCT, ComponentLink2URL=https://datasheet.octopart.com:443/XZMDK54W-4-SunLED-datasheet-142371012.pdf?src-supplier=SunLED+SCT, Country of Origin="Mainland China", Datasheet Link=https://www.sunledusa.com/products/spec/XZMDK54W-4.pdf, Harmonized Tariff Schedule (HTS) Code=8541.40.20.00, Height=0.5mm, Introduction Date=2004-09-24, Lifecycle Status=Production, Luminous Intensity=149mcd, Manufacturer Part Number=XZMDK54W-4, Manufacturer_Name=SunLED, Manufacturer_Part_Number=XZMDK54W-4, Mount="Surface Mount", Number of Circuits=1, Number of Terminals=2, Peak Wavelength=650nm, Pricing 1="1=0.21, 10=0.143, 100=0.0996, 500=0.07964, 1000=0.07301 (USD)", REACH SVHC=Yes, RoHS=Compliant, Shape=Rectangular, Stock 1=23282, Supplier 1=DigiKey, Terminal Pitch=2.1mm, Viewing Angle=110°, Wavelength=650nm
P1 P2: "Header, 19-Pin", LatestRevisionDate=17-Jul-2002, LatestRevisionNote="Re-released for DXP Platform.", Publisher="Altium Limited"
P3: "Header, 10-Pin", LatestRevisionDate=17-Jul-2002, LatestRevisionNote="Re-released for DXP Platform.", Publisher="Altium Limited"
P4 P7: "Header, 5-Pin", LatestRevisionDate=17-Jul-2002, LatestRevisionNote="Re-released for DXP Platform.", Publisher="Altium Limited"
P5: "Header, 7-Pin", LatestRevisionDate=17-Jul-2002, LatestRevisionNote="Re-released for DXP Platform.", Publisher="Altium Limited"
P6: "Header, 4-Pin", LatestRevisionDate=17-Jul-2002, LatestRevisionNote="Re-released for DXP Platform.", Publisher="Altium Limited"
P8: "Header, 6-Pin", LatestRevisionDate=17-Jul-2002, LatestRevisionNote="Re-released for DXP Platform.", Publisher="Altium Limited"
Q1 Q2 Q5 Q6 Q9 Q10: "Phototransistor", Manufacturer_Name="American Bright LED", Mouser Part Number=442-APC817C1SL, Datasheet Link=https://www.americanbrightled.com/pdffiles/ir-uv/ir/APC-817.pdf, Height=3.8mm, Manufacturer_Part_Number=APC-817C1-SL, Mouser Price/Stock=https://www.mouser.co.uk/ProductDetail/American-Bright-LED/APC-817C1-SL?qs=Y0Uzf4wQF3lGQlk7OLeIsw%3D%3D
Q3 Q4 Q7 Q8 Q11 Q12 Q13 Q14: "Transistor BJT NPN", Manufacturer_Name="Comchip Technology", Mouser Part Number=750-MMBT2222A-G, Arrow Part Number=MMBT2222A-G, Arrow Price/Stock=https://www.arrow.com/en/products/mmbt2222a-g/comchip-technology?region=nac, Datasheet Link=https://datasheet.datasheetarchive.com/originals/distributors/Datasheets-7/DSA-138996.pdf, Height=1.15mm, Manufacturer_Part_Number=MMBT2222A-G, Mouser Price/Stock=https://www.mouser.co.uk/ProductDetail/Comchip-Technology/MMBT2222A-G?qs=2qJf6qQ4IOIM%2FSE9iCL8gQ%3D%3D
R1 R2 R5 R6 R9 R10: library part RT0805FRE07680RL, "125mW Thin Film Resistor ±50ppm/℃ ±1% 680Ω 0805 Chip Resistor - Surface Mount ROHS", Case Code (Imperial)=0805, Manufacturer="Yageo Group", Manufacturer Package Identifier="0805 (2012 metric)", Max Operating Temperature=155°C, Max Power Dissipation=125mW, Min Operating Temperature=-55°C, Supplier Part Number 1=13-RT0805FRE07680RLCT-ND, Temperature Coefficient=50ppm/°C, Tolerance=1%, Voltage Rating=150V, Case/Package=0805, Category="Chip SMD Resistors", China RoHS=Non-Compliant, ComponentLink1Description=https://datasheet.octopart.com:443/RT0805FRE07680RL-Yageo-datasheet-176402239.pdf?src-supplier=Future+Electronics, ComponentLink1URL=https://datasheet.octopart.com:443/RT0805FRE07680RL-Yageo-datasheet-176402239.pdf?src-supplier=Future+Electronics, ComponentLink2Description=https://datasheet.octopart.com:443/RT0805FRE07680RL-Yageo-datasheet-169971040.pdf?src-supplier=Future+Electronics, ComponentLink2URL=https://datasheet.octopart.com:443/RT0805FRE07680RL-Yageo-datasheet-169971040.pdf?src-supplier=Future+Electronics, ComponentLink3Description=https://datasheet.octopart.com:443/RT0805FRE07680RL-Yageo-datasheet-166250672.pdf?src-supplier=Future+Electronics, ComponentLink3URL=https://datasheet.octopart.com:443/RT0805FRE07680RL-Yageo-datasheet-166250672.pdf?src-supplier=Future+Electronics, ComponentLink4Description=https://datasheet.octopart.com:443/RT0805FRE07680RL-Yageo-datasheet-96443642.pdf?src-supplier=Upverter, ComponentLink4URL=https://datasheet.octopart.com:443/RT0805FRE07680RL-Yageo-datasheet-96443642.pdf?src-supplier=Upverter, ComponentLink5Description=https://datasheet.octopart.com:443/RT0805FRE07680RL-Yageo-datasheet-8324589.pdf?src-supplier=Farnell, ComponentLink5URL=https://datasheet.octopart.com:443/RT0805FRE07680RL-Yageo-datasheet-8324589.pdf?src-supplier=Farnell, ComponentLink6Description=https://datasheet.octopart.com/RT0805FRE07680RL-Yageo-datasheet-86813807.pdf, ComponentLink6URL=https://datasheet.octopart.com/RT0805FRE07680RL-Yageo-datasheet-86813807.pdf, ComponentLink7Description=http://sigma.octopart.com:80/conflict_mineral_statement/Yageo-company-3.pdf?src-supplier=Compliance+Statements, ComponentLink7URL=http://sigma.octopart.com:80/conflict_mineral_statement/Yageo-company-3.pdf?src-supplier=Compliance+Statements, ComponentLink8Description=http://sigma.octopart.com:80/rohs_statement/Yageo-company-2.pdf?src-supplier=Compliance+Statements, ComponentLink8URL=http://sigma.octopart.com:80/rohs_statement/Yageo-company-2.pdf?src-supplier=Compliance+Statements, Composition="Thin Film", Contact Plating=Tin, Country of Origin="Mainland China, Taiwan", Export Control Classification Number (ECCN) Code=EAR99, Harmonized Tariff Schedule (HTS) Code=8533.21.00.30, Height=500µm, Introduction Date=2008-07-11, Lead Free="Lead Free", Length=2mm, Lifecycle Status=Production, Manufacturer Part Number=RT0805FRE07680RL, Mount="Surface Mount", Number of Pins=2, Number of Terminals=2, Number of Terminations=2, Packaging="Tape & Reel (TR)", Power Rating=125mW, Pricing 1="1=0.1, 10=0.019, 50=0.0166, 100=0.0157, 500=0.01376 (USD)", Radiation Hardening=No, REACH SVHC=Yes, Resistance=680Ω, RoHS=Compliant, Stock 1=3497, Supplier 1=DigiKey, Voltage Rating (DC)=150V, Width=1.25mm, Working Voltage=150V
R3 R4 R7 R8 R11 R12: library part AT0805DRD071KL, "Resistor", Manufacturer_Name="Yageo Group", Mouser Part Number=603-AT0805DRD071KL, Datasheet Link=https://www.yageo.com/upload/media/product/productsearch/datasheet/rchip/PYu-AT_51_RoHS_L_5.pdf, Height=0.6mm, Manufacturer_Part_Number=AT0805DRD071KL, Mouser Price/Stock=https://www.mouser.com/Search/Refine.aspx?Keyword=603-AT0805DRD071KL
R13: library part AF0805FR-074K7L, "Res Thick Film 0805 4.7K Ohm 1% 0.125W(1/8W) ±100ppm/C Sulfur Resistant Pad SMD Automotive T/R", Case/Package=0805, Manufacturer="Yageo Group", Max Operating Temperature=155°C, Max Power Dissipation=125mW, Min Operating Temperature=-55°C, Ratings=AEC-Q200, Supplier Part Number 1=13-AF0805FR-074K7LCT-ND, Temperature Coefficient=100ppm/°C, Tolerance=1%, Voltage Rating=150V, Category="Chip SMD Resistors", China RoHS=Non-Compliant, ComponentLink1Description=https://datasheet.octopart.com:443/AF0805FR-074K7L-Yageo-datasheet-182189395.pdf?src-supplier=IHS, ComponentLink1URL=https://datasheet.octopart.com:443/AF0805FR-074K7L-Yageo-datasheet-182189395.pdf?src-supplier=IHS, ComponentLink2Description=https://datasheet.octopart.com:443/AF0805FR-074K7L-Yageo-datasheet-153645569.pdf?src-supplier=Upverter, ComponentLink2URL=https://datasheet.octopart.com:443/AF0805FR-074K7L-Yageo-datasheet-153645569.pdf?src-supplier=Upverter, ComponentLink3Description=https://sigma.octopart.com:443/138820526/technical_drawing/Yageo-AF0805FR-074K7L.pdf?src-supplier=Upverter, ComponentLink3URL=https://sigma.octopart.com:443/138820526/technical_drawing/Yageo-AF0805FR-074K7L.pdf?src-supplier=Upverter, ComponentLink4Description=https://datasheet.octopart.com:443/AF0805FR-074K7L-Yageo-datasheet-164730775.pdf?src-supplier=Future+Electronics, ComponentLink4URL=https://datasheet.octopart.com:443/AF0805FR-074K7L-Yageo-datasheet-164730775.pdf?src-supplier=Future+Electronics, ComponentLink5Description=https://datasheet.octopart.com:443/AF0805FR-074K7L-Yageo-datasheet-137481464.pdf?src-supplier=Future+Electronics, ComponentLink5URL=https://datasheet.octopart.com:443/AF0805FR-074K7L-Yageo-datasheet-137481464.pdf?src-supplier=Future+Electronics, ComponentLink6Description=https://datasheet.octopart.com/AF0805FR-074K7L-Yageo-datasheet-68296209.pdf, ComponentLink6URL=https://datasheet.octopart.com/AF0805FR-074K7L-Yageo-datasheet-68296209.pdf, ComponentLink7Description=http://sigma.octopart.com:80/conflict_mineral_statement/Yageo-company-3.pdf?src-supplier=Compliance+Statements, ComponentLink7URL=http://sigma.octopart.com:80/conflict_mineral_statement/Yageo-company-3.pdf?src-supplier=Compliance+Statements, ComponentLink8Description=http://sigma.octopart.com:80/rohs_statement/Yageo-company-2.pdf?src-supplier=Compliance+Statements, ComponentLink8URL=http://sigma.octopart.com:80/rohs_statement/Yageo-company-2.pdf?src-supplier=Compliance+Statements, Composition="Thick Film", Country of Origin="Mainland China, Taiwan", Export Control Classification Number (ECCN) Code=EAR99, Features="Anti-Sulfur, Moisture Resistant", Harmonized Tariff Schedule (HTS) Code=8533.21.00.30, Height=500µm, Introduction Date=2012-05-08, Length=2mm, Lifecycle Status=Production, Manufacturer Part Number=AF0805FR-074K7L, Mount="Surface Mount", Number of Terminals=2, Number of Terminations=2, Packaging="Tape & Reel", Power Rating=125mW, Pricing 1="1=0.12, 10=0.058, 25=0.0448, 50=0.0372, 100=0.0313, 250=0.0254, 500=0.022, 1000=0.01931 (USD)", REACH SVHC=Yes, Resistance=4.7kΩ, RoHS=Compliant, Stock 1=4475, Supplier 1=DigiKey, Width=1.25mm, Working Voltage=150V